# EAGLE board Volting_MUSIC_EAGLE_Prototype_V1_2_Board (EAGLE 9.6.2)
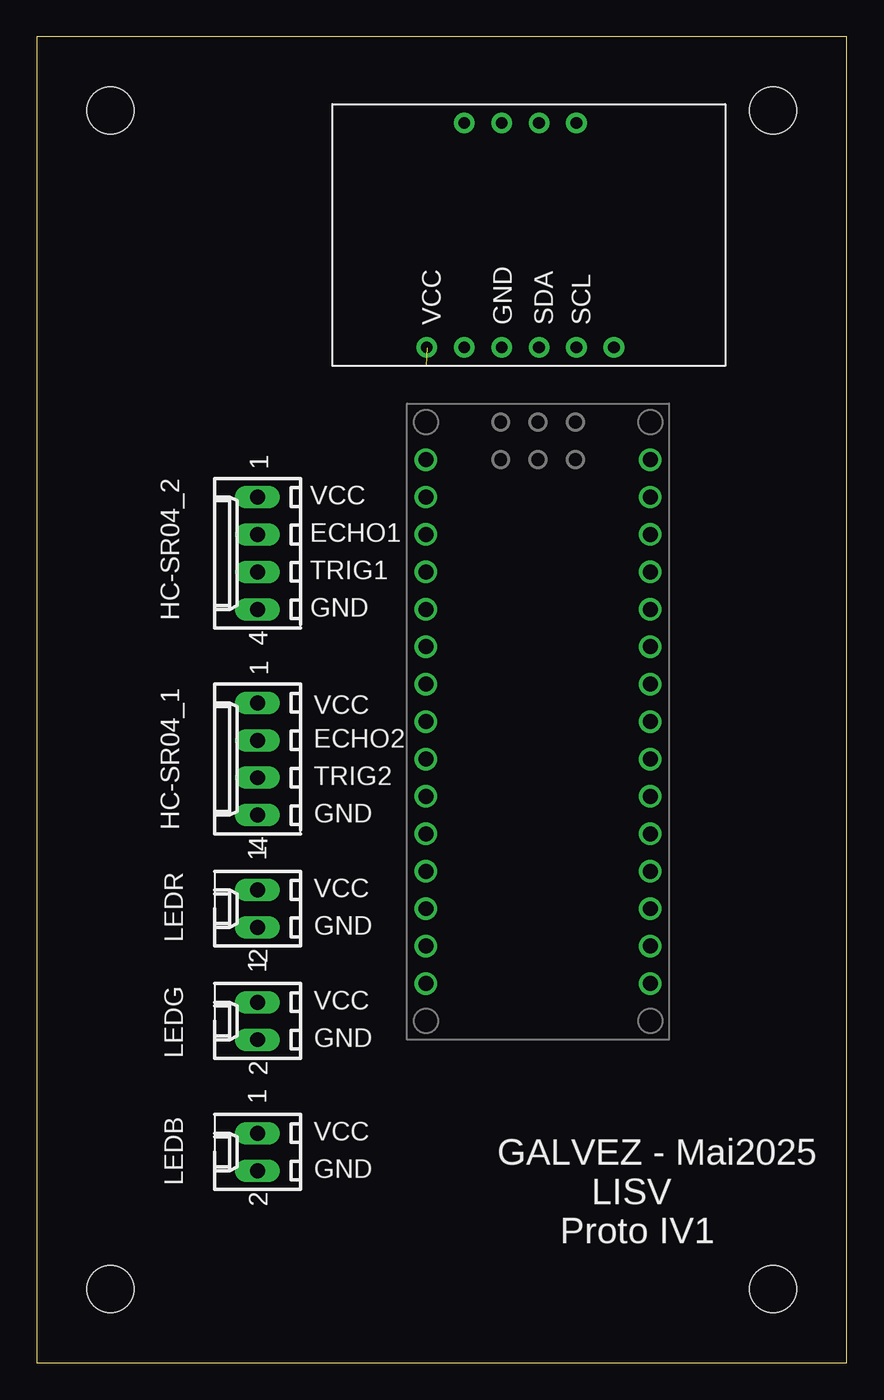
[diagram p0: board, top side]
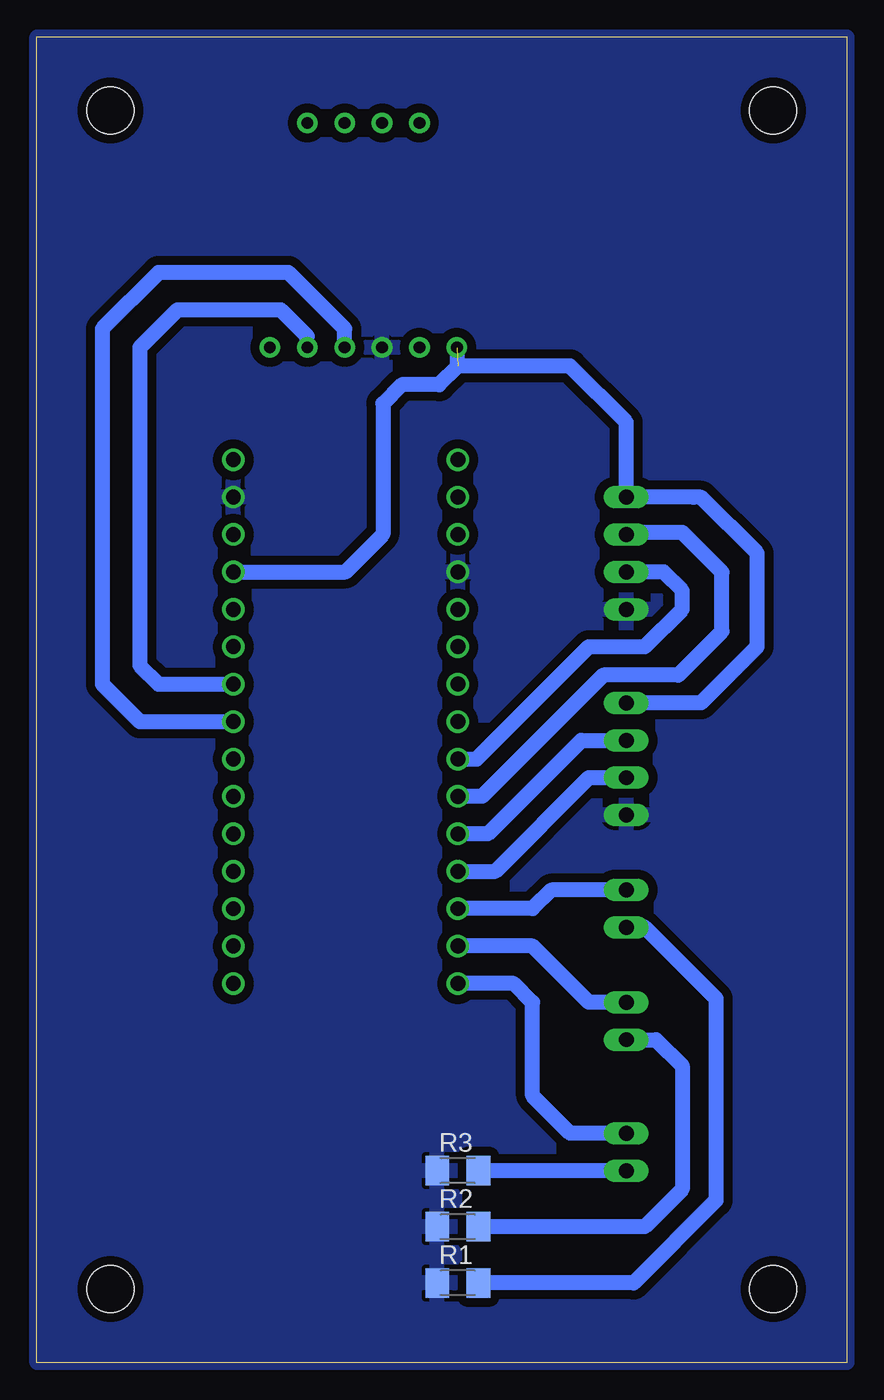
[diagram p1: board, bottom side, seen from below]

Size 55 x 90 mm. Coordinates in mm from the lower left corner, seen from the top.
Outline: 0,0 55,0 55,90 0,90 0,0
Copper layers (1*16): Top 0.035mm / dielectric 1.5mm / Bottom 0.035mm
Design rules "default *": minimum track width 6mil, minimum drill 0.35mm, track to track 6mil, track to pad 6mil, pad to pad 6mil, via to via 6mil, smd to smd 6mil, copper to edge 0mil, drill to drill 2mil, minimum pad ring 10mil, minimum via ring 8mil, stop-mask expansion 4mil, vias tented up to drill 0mil, thermal gap 10mil
Holes 3.2 mm at 5,5 50,5 50,85 5,85

## Footprints (pad centres in the part's own frame; a part is rotated, then mirrored left to right if it is on the bottom)
6410-04 = drill 1.016 long: 1 3.81,0; 2 1.27,0; 3 -1.27,0; 4 -3.81,0
NANO = drill 1.016: 1 -7.62,17.78; 2 -7.62,15.24; 3 -7.62,12.7; 4 -7.62,10.16; 5 -7.62,7.62; 6 -7.62,5.08; 7 -7.62,2.54; 8 -7.62,0; 9 -7.62,-2.54; 10 -7.62,-5.08; 11 -7.62,-7.62; 12 -7.62,-10.16; 13 -7.62,-12.7; 14 -7.62,-15.24; 15 -7.62,-17.78; 16 7.62,-17.78; 17 7.62,-15.24; 18 7.62,-12.7; 19 7.62,-10.16; 20 7.62,-7.62; 21 7.62,-5.08; 22 7.62,-2.54; 23 7.62,0; 24 7.62,2.54; 25 7.62,5.08; 26 7.62,7.62; 27 7.62,10.16; 28 7.62,12.7; 29 7.62,15.24; 30 7.62,17.78
6410-02 = drill 1.016 long: 1 1.27,0; 2 -1.27,0
M1206 = smd 1.6 x 2: 1 -1.4,0; 2 1.4,0
BNO055 = drill 0.8 pad 1.397: 3V 8.954,-19.05; ADR 16.573,-3.81; GND 11.493,-19.05; INT 14.034,-3.81; PS0 8.954,-3.81; PS1 11.493,-3.81; RST 19.113,-19.05; SCL 16.573,-19.05; SDA 14.034,-19.05; VIN 6.413,-19.05

## Placement (x,y rotation side)
HC-SR04_1  22-27-2041-04  [6410-04]  14.99,40.98 90 top
HC-SR04_2  22-27-2041-04  [6410-04]  14.99,54.95 90 top
J1  NANO_FOOTPRINT  [NANO]  34.04,43.52 0 top
LEDB  22-27-2021-02  [6410-02]  14.99,14.31 90 top
LEDG  22-27-2021-02  [6410-02]  14.99,23.2 90 top
LEDR  22-27-2021-02  [6410-02]  14.99,30.82 90 top
R1  220  [M1206]  26.42,5.42 0 bottom
R2  220  [M1206]  26.42,9.23 0 bottom
R3  220  [M1206]  26.42,13.04 0 bottom
U$1  BNO055  [BNO055]  20.07,87.97 0 top

## Library data of the parts
HC-SR04_1 HC-SR04_2 LEDB LEDG LEDR = con-molex; MF: MOLEX; OC_FARNELL: unknown; OC_NEWARK: unknown
J1 = SparkFun-Boards
R1-R3 = rcl; SPICEPREFIX: R
U$1 = BNO055_perso

## Nets
+5V: HC-SR04_1.1 HC-SR04_2.1 J1.27 U$1.VIN
BLUE_LED: J1.13 LEDR.1
ECHO1: HC-SR04_2.2 J1.10
ECHO2: HC-SR04_1.2 J1.11
GND: HC-SR04_1.4 HC-SR04_2.4 J1.4 J1.29 R1.1 R2.1 R3.1 U$1.GND
GREEN_LED: J1.14 LEDG.1
N$2: LEDR.2 R1.2
N$3: LEDG.2 R2.2
N$4: LEDB.2 R3.2
RED_LED: J1.15 LEDB.1
SCL: J1.24 U$1.SCL
SDA: J1.23 U$1.SDA
TRIG1: HC-SR04_2.3 J1.9
TRIG2: HC-SR04_1.3 J1.12

## Tracks (layer width: path | path; a pad name or v marks a point on that pad's centre or on a via)
+5V  (1 unrouted)
  Bottom 1.016: 26.42,67.65 18.8,67.65 14.99,63.84 HC-SR04_2.1 10.41,58.76 9.91,58.76 6.1,54.95 6.1,48.6 9.91,44.79 HC-SR04_1.1 | U$1.VIN 26.48,67.58 27.69,66.38 30.23,66.38 31.5,65.11 31.5,56.22 34.04,53.68 J1.27
BLUE_LED
  Bottom 1.016: LEDR.1 20.07,32.09 21.34,30.82 J1.13
ECHO1
  Bottom 1.016: HC-SR04_2.2 14.83,56.37 11.2,56.37 8.48,53.65 8.48,49.64 11.45,46.67 16.53,46.67 24.76,38.44 J1.10
ECHO2
  Bottom 1.016: J1.11 24.38,35.9 18.03,42.25 HC-SR04_1.2
GND
  pour Bottom (isolate 0.61): 0,90 0,0 55,0 55,90
GREEN_LED
  Bottom 1.016: LEDG.1 17.53,24.47 21.34,28.28 J1.14
N$2
  Bottom 1.016: LEDR.2 13.72,29.55 8.89,24.72 8.89,11.01 14.48,5.42 R1.2
N$3
  Bottom 1.016: LEDG.2 12.95,21.93 11.18,20.15 11.18,11.77 13.72,9.23 R2.2
N$4
  Bottom 1.016: LEDB.2 R3.2
RED_LED
  Bottom 1.016: LEDB.1 18.8,15.58 21.34,18.12 21.34,24.47 22.61,25.74 J1.15
SCL
  Bottom 1.016: U$1.SCL 36.64,69.68 38.42,71.46 45.47,71.46 48.01,68.92 48.01,47.33 46.74,46.06 J1.24
SDA
  Bottom 1.016: U$1.SDA 34.1,70.19 37.91,74 46.74,74 50.55,70.19 50.55,46.06 48.01,43.52 J1.23
TRIG1
  Bottom 1.016: J1.9 25.15,40.98 17.53,48.6 13.72,48.6 11.18,51.14 11.18,52.41 12.45,53.68 HC-SR04_2.3
TRIG2
  Bottom 1.016: J1.12 23.88,33.36 17.53,39.71 HC-SR04_1.3

## Text on the board
tPlace: VCC | GND | SDA | SCL | VCC | ECHO1 | TRIG1 | GND | VCC | ECHO2 | TRIG2 | GND | VCC | GND | VCC | GND | VCC | GND | GALVEZ - Mai2025 / LISV / Proto IV1